# Altium PCB PCB1.PcbDoc (part 1 of 4)
Units mil, origin at the board's own origin, x right, y up, seen from the top; angles counter-clockwise.
Board outline 1968.5 x 2362.2 mil, 4 copper layers (Top Layer, GND, VCC, Bottom Layer), stack 30.634 mil thick; 134 components, 248 nets, 1063 pads, 710 vias.
Unrouted connection lines stored in the file: 163.
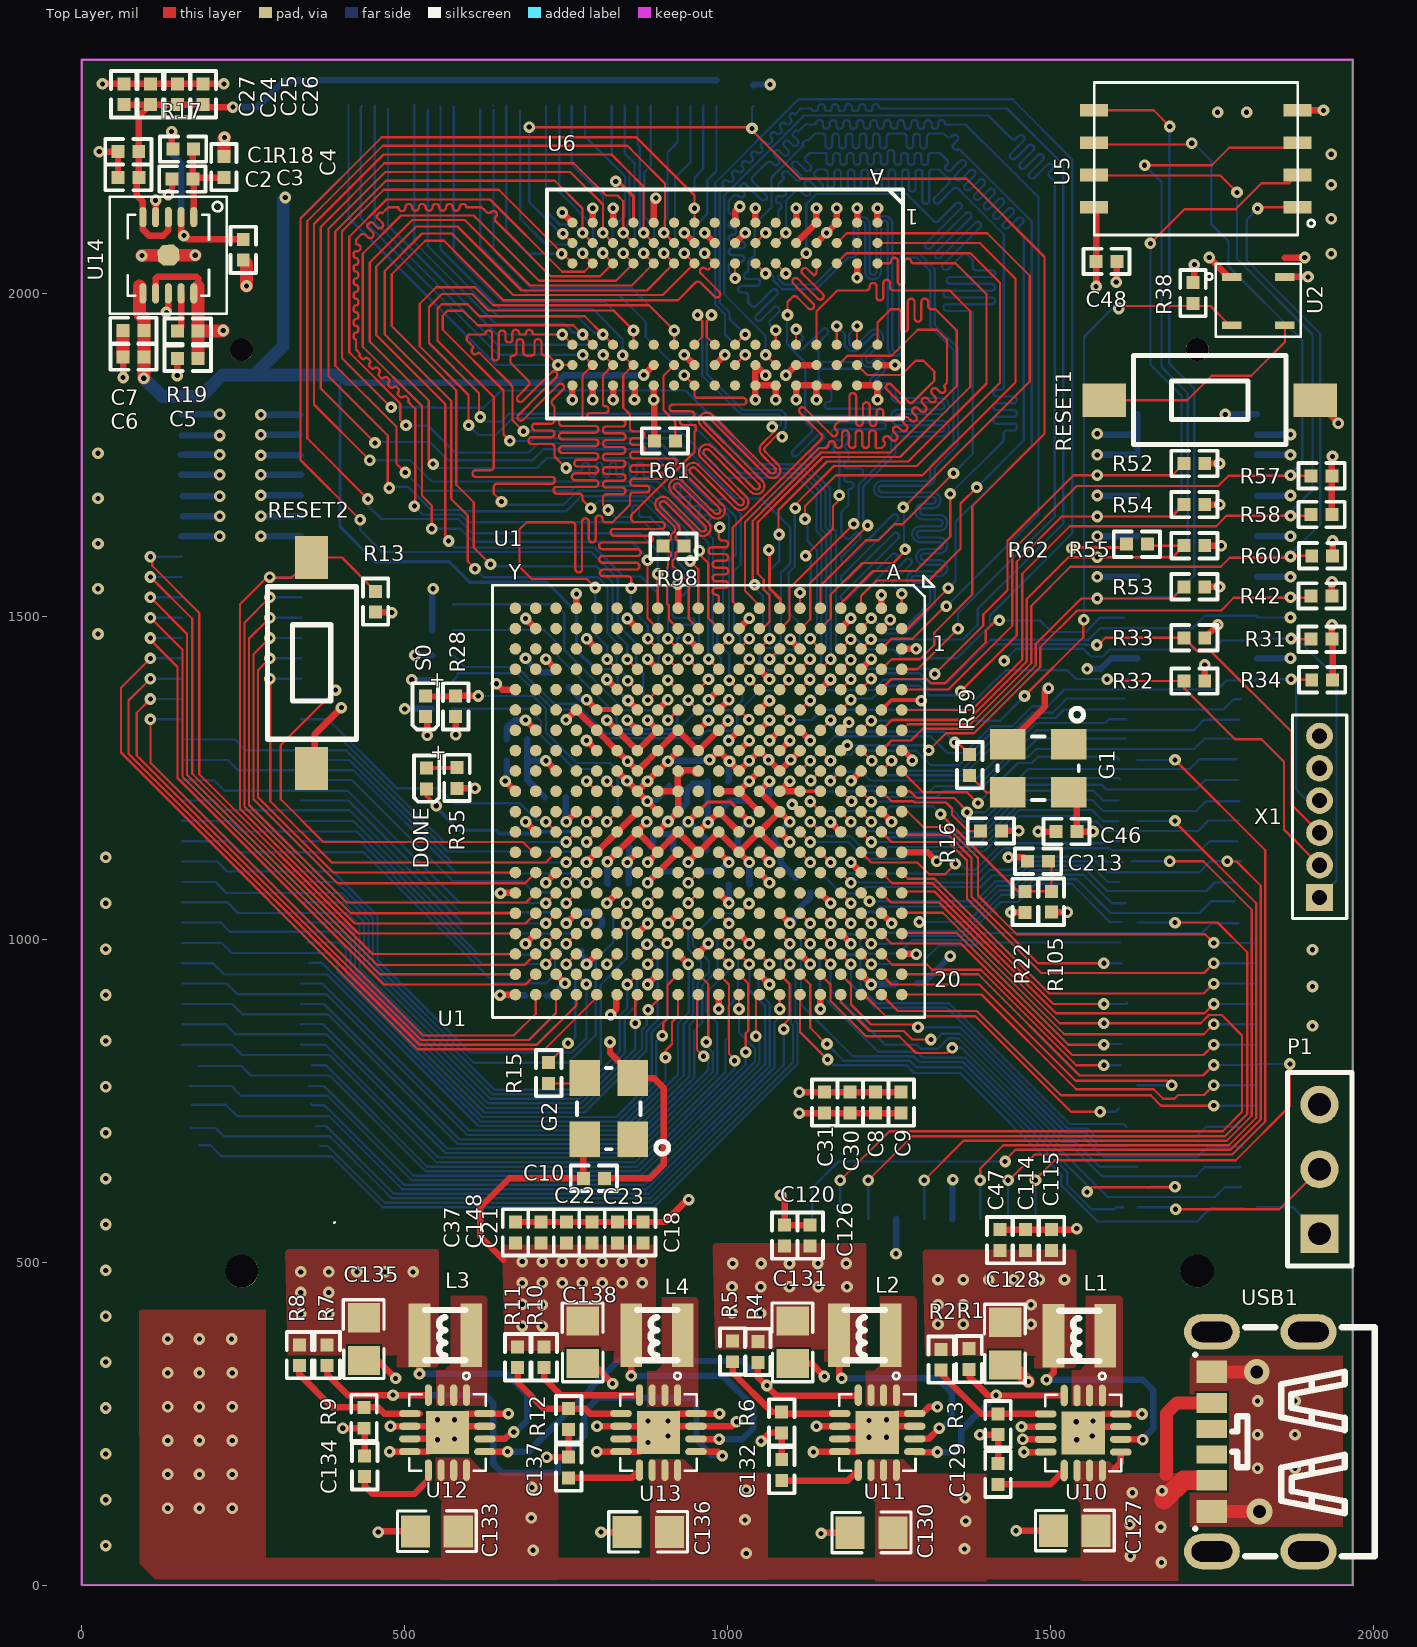
[diagram p0: Top Layer view]
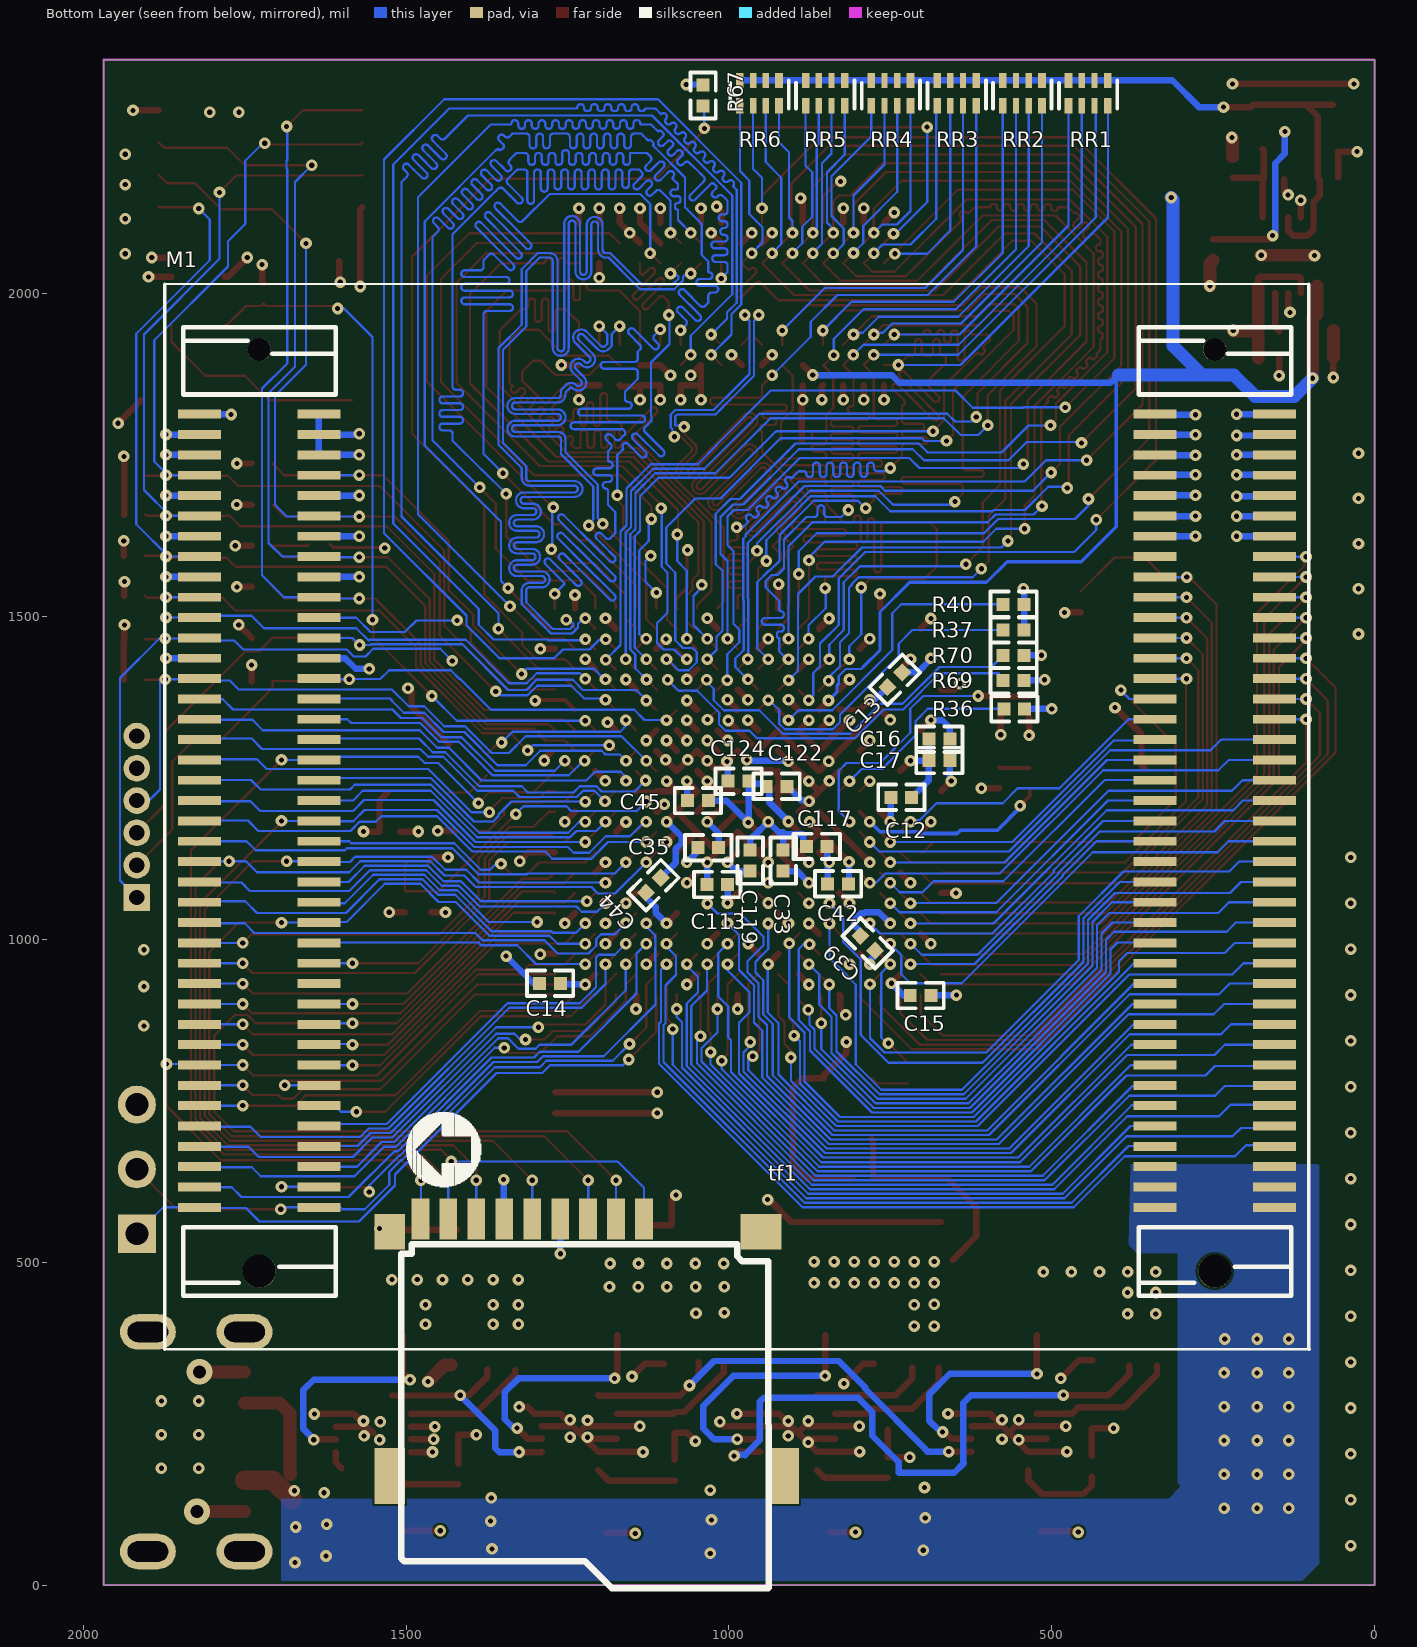
[diagram p1: Bottom Layer view, seen from below]
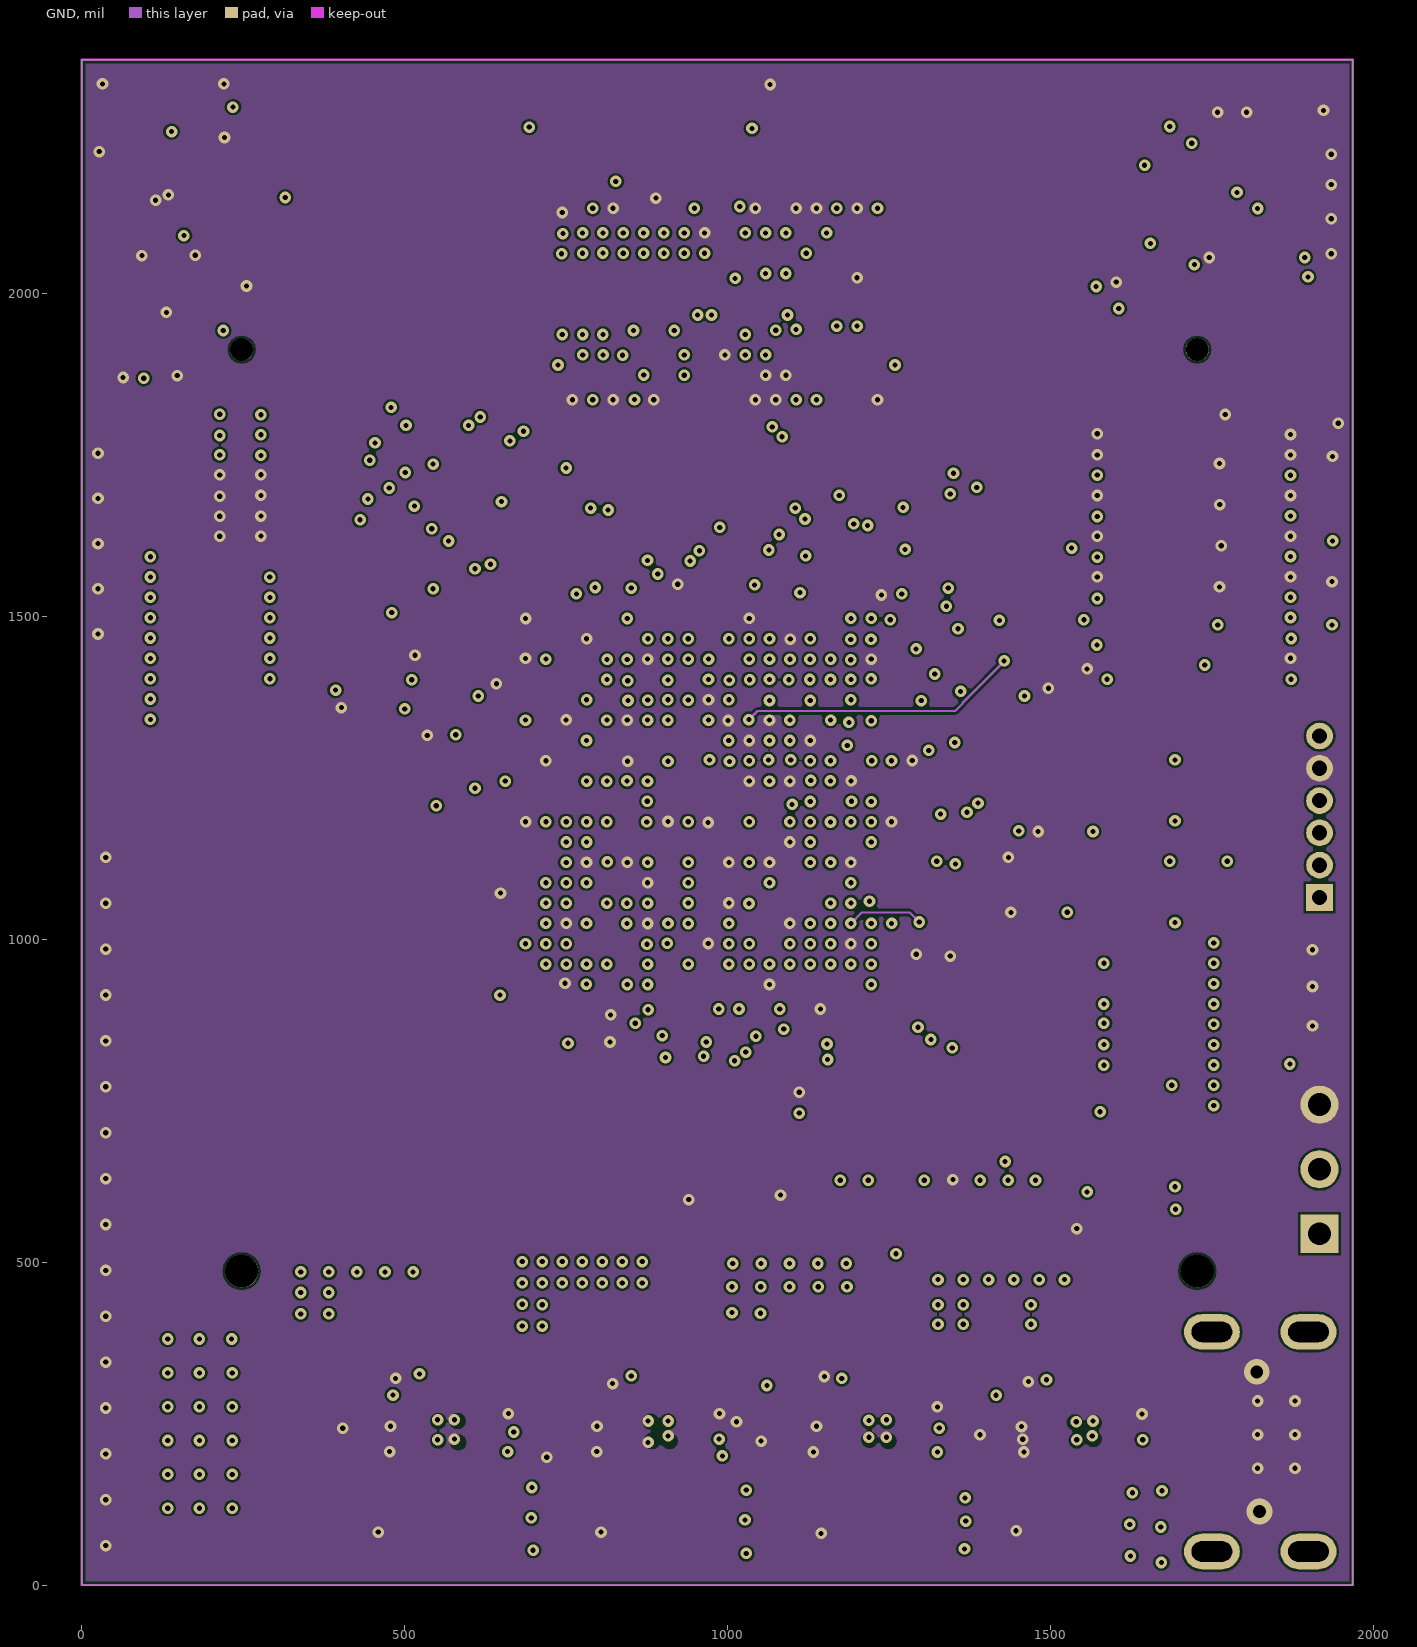
[diagram p2: GND]
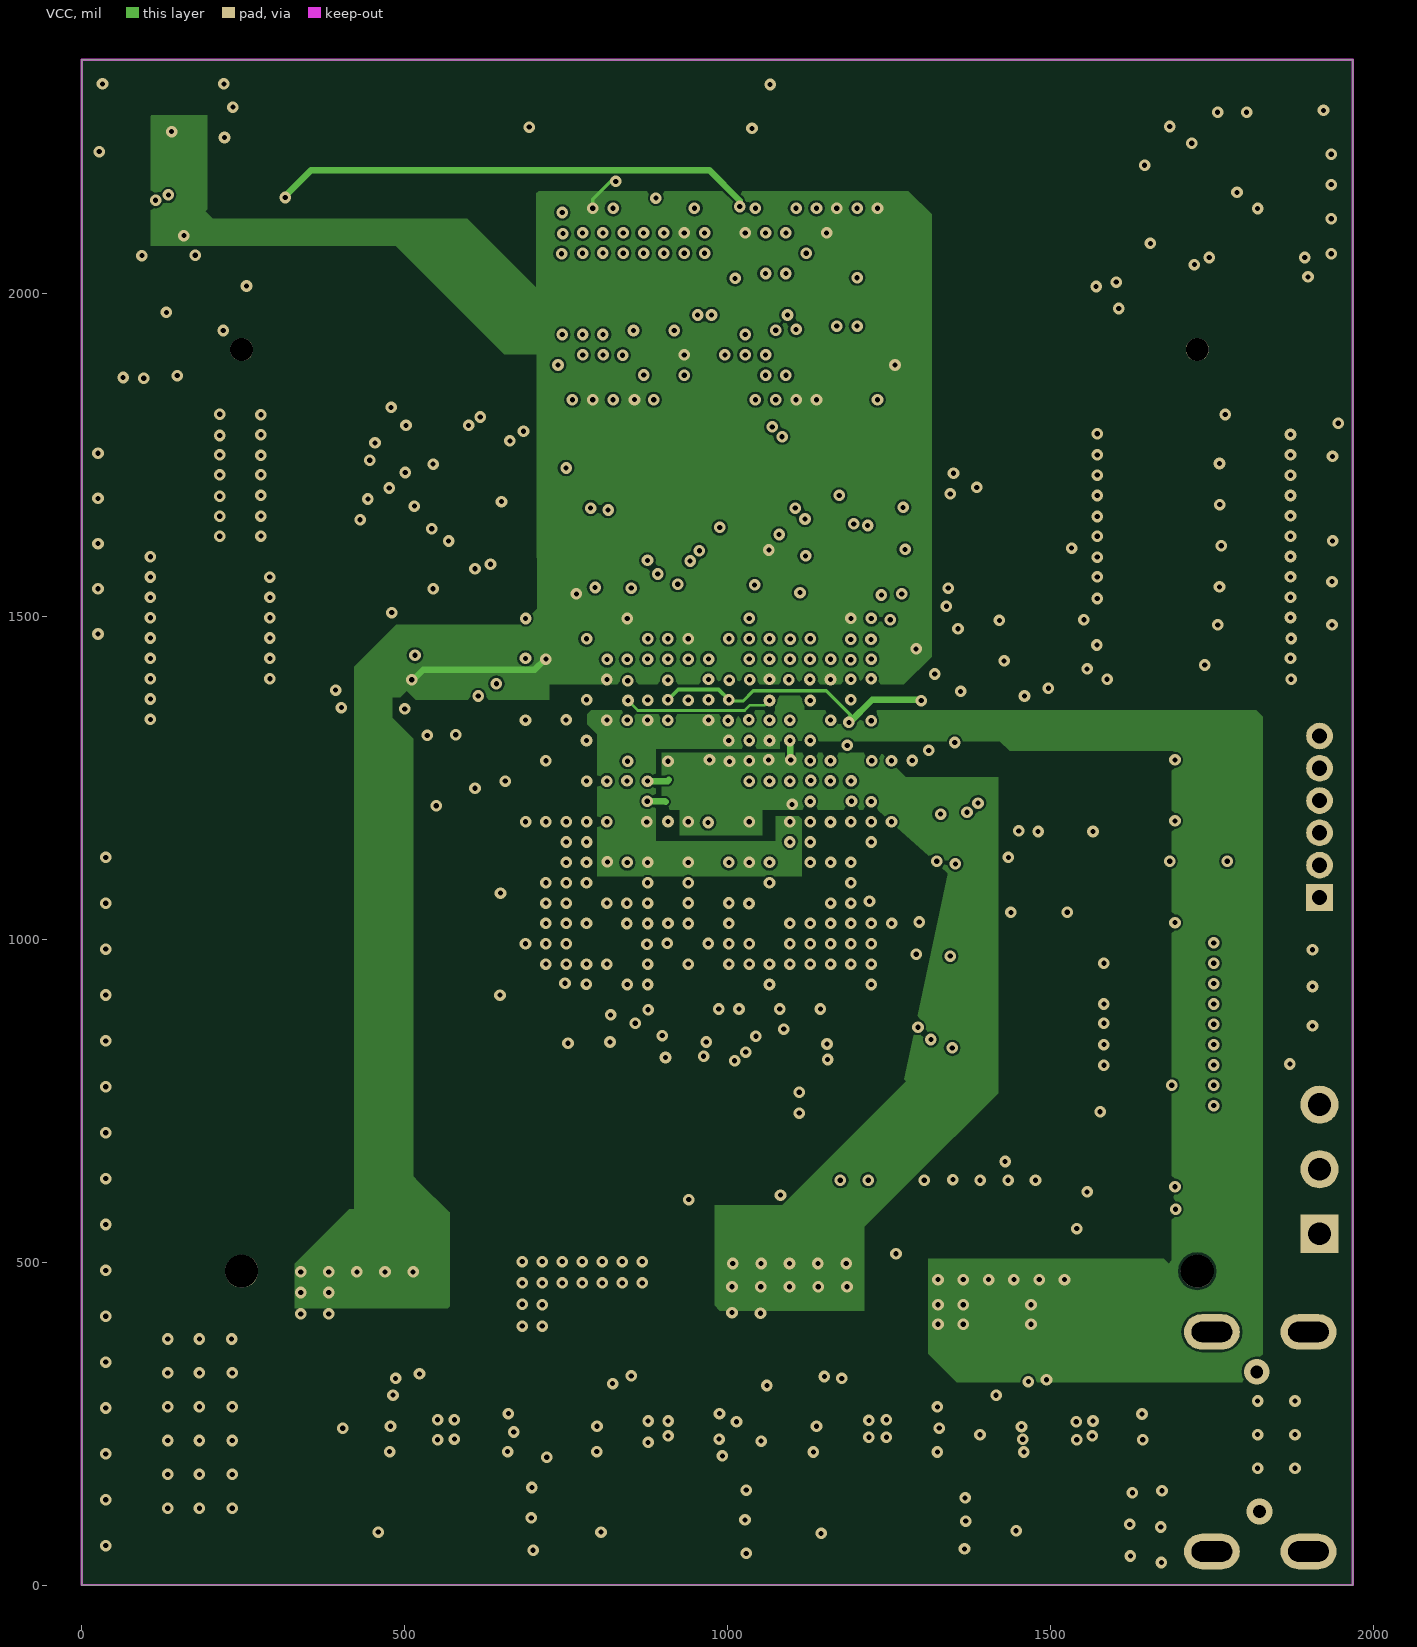
[diagram p3: VCC]

## Layer stack, top to bottom
Top Solder: solder mask 0.4, Solder Resist, Dk 3.5
Top Layer: signal copper 1.4
Dielectric 1: core 10, FR-4, Dk 4.2
GND: signal copper 1.417
Dielectric 3: prepreg 5, Dk 4.2
VCC: signal copper 1.417
Dielectric 2: core 10, Dk 4.2
Bottom Layer: signal copper 1.4
Bottom Solder: solder mask 0.4, Solder Resist, Dk 3.5

## Board outline
0,0 1968.5,0 1968.5,2362.2 0,2362.2

## Design rules (kind name [scope] priority, off if disabled: settings)
Clearance Clearance_2 [InNamedPolygon('POWER3')] p1: gap=10 ignorepadtopadclearanceinfootprint=FALSE
Clearance Clearance_1 [InNamedPolygon('POWER2')] p2: gap=5 ignorepadtopadclearanceinfootprint=FALSE
Clearance [All] p3: gap=3.5 ignorepadtopadclearanceinfootprint=FALSE
DiffPairsRouting DiffPair_DiffPairsRouting [InDifferentialPair ('ADDR3-CLK0')] p1: maxlimit=10 minlimit=3.5 mostfreqgap=3.5 toplayer_minwidth=3.5 toplayer_maxwidth=5 toplayer_prefwidth=3.5 midlayer1_minwidth=3.5 midlayer1_maxwidth=5 midlayer1_prefwidth=3.5 midlayer2_minwidth=3.5 midlayer2_maxwidth=5 midlayer2_prefwidth=3.5 bottomlayer_minwidth=3.5 bottomlayer_maxwidth=5 bottomlayer_prefwidth=3.5 maxuncoupledlength=500
DiffPairsRouting [All] p2: maxlimit=10 minlimit=3.5 mostfreqgap=3.5 toplayer_minwidth=3.5 toplayer_maxwidth=5 toplayer_prefwidth=3.5 midlayer1_minwidth=3.5 midlayer1_maxwidth=5 midlayer1_prefwidth=3.5 midlayer2_minwidth=3.5 midlayer2_maxwidth=5 midlayer2_prefwidth=3.5 bottomlayer_minwidth=3.5 bottomlayer_maxwidth=5 bottomlayer_prefwidth=3.5 maxuncoupledlength=500
MatchedLengths MatchedLengths_1 [All] p1: tolerance=1000 checknetsindiffpair=FALSE checkdiffpairvsdiffpair=TRUE checkxsignals=TRUE checkothers=TRUE
MatchedLengths [InDifferentialPair ('ADDR3-CLK0')] p2: tolerance=1000 checknetsindiffpair=FALSE checkdiffpairvsdiffpair=TRUE checkxsignals=TRUE checkothers=TRUE
MatchedLengths DiffPair_MatchedLengths [InDifferentialPair ('ADDR3-CLK0')] p3: tolerance=1000 checknetsindiffpair=FALSE checkdiffpairvsdiffpair=TRUE checkxsignals=TRUE checkothers=TRUE
PolygonConnect [All] p1: connectstyle=Direct reliefconductorwidth=10 reliefentries=4 polygonreliefangle="90 Angle" airgapwidth=10
RoutingVias [All] p1: holewidth=8 width=18 viastyle="Through Hole" minholewidth=8 minwidth=18 maxholewidth=28 maxwidth=50
SolderMaskExpansion [All] p1: expansion=4
Width power [InNetClass('POWER')] p1: maxlimit=40 minlimit=3.5 preferedwidth=10
Width [All] p2: maxlimit=40 minlimit=3.5 preferedwidth=3.5
29 further rules are at their usual default settings.

## Classes and differential pairs
net class sd: MMC-CMD MMC-D0 MMC-D1 MMC-D2 MMC-D3 MMC-SCLK
net class ddr_dh: ADDR3-D8 ADDR3-D9 ADDR3-D10 ADDR3-D11 ADDR3-D12 ADDR3-D13 ADDR3-D14 ADDR3-D15 ADDR3-DM1 ADDR3-DQS1_N ADDR3-DQS1_P
net class b35_io: B35_0 B35_25 B35_L1_N B35_L1_P B35_L2_N B35_L2_P B35_L3_N B35_L3_P B35_L4_N B35_L4_P B35_L5_N B35_L5_P B35_L6_N B35_L6_P B35_L7_N B35_L7_P B35_L8_N B35_L8_P B35_L9_N B35_L9_P B35_L10_N B35_L10_P B35_L11_N B35_L11_P B35_L12_N B35_L12_P B35_L13_N B35_L13_P B35_L14_N B35_L14_P B35_L15_N B35_L15_P B35_L16_N B35_L16_P B35_L17_N B35_L17_P B35_L18_N B35_L18_P B35_L19_N B35_L19_P B35_L20_N B35_L20_P B35_L21_N B35_L21_P B35_L22_N B35_L22_P B35_L23_N B35_L23_P B35_L24_N B35_L24_P
net class b34_io: B34_0 B34_25 B34_L1_N B34_L1_P B34_L2_N B34_L2_P B34_L3_N B34_L3_P B34_L4_N B34_L4_P B34_L5_N B34_L5_P B34_L6_N B34_L6_P B34_L7_N B34_L7_P B34_L8_N B34_L8_P B34_L9_N B34_L9_P B34_L10_N B34_L10_P B34_L11_N B34_L11_P B34_L12_N B34_L12_P B34_L13_N B34_L13_P B34_L14_N B34_L14_P B34_L15_N B34_L15_P B34_L16_N B34_L16_P B34_L17_N B34_L17_P B34_L18_N B34_L18_P B34_L19_N B34_L19_P B34_L20_N B34_L20_P B34_L21_N B34_L21_P B34_L22_N B34_L22_P B34_L23_N B34_L23_P B34_L24_N B34_L24_P
net class psio: MIO9 MIO10 MIO11 MIO12 MIO13 MIO14 MIO15 MIO16 MIO17 MIO18 MIO19 MIO20 MIO21 MIO22 MIO23 MIO24 MIO25 MIO26 MIO27 MIO28 MIO29 MIO30 MIO31 MIO32 MIO33 MIO34 MIO35 MIO36 MIO37 MIO38 MIO39 MIO46 MIO47 MIO48 MIO49 MIO50 MIO51 MIO52 MIO53 MMC-CMD MMC-D0 MMC-D1 MMC-D2 MMC-D3
net class mode: ASPI-CS ASPI-DQ0/MODE0 ASPI-DQ1/MODE1 ASPI-DQ2/MODE2 ASPI-DQ3/MODE3 ASPI-SCK/MODE4 V500 V501
net class ddr_c: ADDR3-A0 ADDR3-A1 ADDR3-A2 ADDR3-A3 ADDR3-A4 ADDR3-A5 ADDR3-A6 ADDR3-A7 ADDR3-A8 ADDR3-A9 ADDR3-A10 ADDR3-A11 ADDR3-A12 ADDR3-A13 ADDR3-A14 ADDR3-BA0 ADDR3-BA1 ADDR3-BA2 ADDR3-CAS ADDR3-CKE0 ADDR3-ODT0 ADDR3-RAS ADDR3-S0 ADDR3-WE
net class ddr_x: ADDR3-A0 ADDR3-A1 ADDR3-A2 ADDR3-A3 ADDR3-A4 ADDR3-A5 ADDR3-A6 ADDR3-A7 ADDR3-A8 ADDR3-A9 ADDR3-A10 ADDR3-A11 ADDR3-A12 ADDR3-A13 ADDR3-A14 ADDR3-BA0 ADDR3-BA1 ADDR3-BA2 ADDR3-CAS ADDR3-CKE0 ADDR3-ODT0 ADDR3-RAS ADDR3-S0 ADDR3-WE
net class ddr_dl: ADDR3-D0 ADDR3-D1 ADDR3-D2 ADDR3-D3 ADDR3-D4 ADDR3-D5 ADDR3-D6 ADDR3-D7 ADDR3-DM0 ADDR3-DQS0_N ADDR3-DQS0_P
net class ddr_a: ADDR3-A0 ADDR3-A1 ADDR3-A2 ADDR3-A3 ADDR3-A4 ADDR3-A5 ADDR3-A6 ADDR3-A7 ADDR3-A8 ADDR3-A9 ADDR3-A10 ADDR3-A11 ADDR3-A12 ADDR3-A13 ADDR3-A14 ADDR3-CLK0_N ADDR3-CLK0_P
net class POWER: GND VCC-1V0 VCC-1V5 VCC-1V8 VCC-3V3
component class ZYNQ400-POWER: C42 C44 C45 C47 C113 C114 C115 C117 C119 C120 C122 C124 C126
component class ZYNQ400-MIO: C30 C31 C33 C35 C37 C39 C46 C48 C148 C213 DONE G1 R16 R22 R31 R32 R33 R34 R35 R36 R37 R38 R40 R42 R52 R53 R54 R55 R57 R58 R59 R60 R62 R105 RESET1 tf1 U1 U2 U5 X1
component class ZYNQ400-EMIO: C8 C9 C10 C12 C13 C14 C15 C16 C17 C18 C21 C22 C23 G2 R13 R15 R28 RESET2 S0
component class ZYNQ400-DDR: R61 R67 R69 R70 R98 RR1 RR2 RR3 RR4 RR5 RR6 U6
component class ZYNQ400-CONDIP: M1 P1
component class SYS-PS: C1 C2 C3 C4 C5 C6 C7 C24 C25 C26 C27 C127 C128 C129 C130 C131 C132 C133 C134 C135 C136 C137 C138 L1 L2 L3 L4 R1 R2 R3 R4 R5 R6 R7 R8 R9 R10 R11 R12 R17 R18 R19 U10 U11 U12 U13 U14 USB1
differential pair ADDR3-DQS1: +ADDR3-DQS1_P -ADDR3-DQS1_N
differential pair ADDR3-DQS0: +ADDR3-DQS0_P -ADDR3-DQS0_N
differential pair ADDR3-CLK0: +ADDR3-CLK0_P -ADDR3-CLK0_N

## Components (designator, comment, footprint, x,y, rotation, side; value= is the part's Value field where it differs from the comment)
C1 "10UF" 0402 72,2220 r0 top
C2 "10UF" 0402 72.14,2180 r0 top
C3 "10UF" 0402 250,2068 r90 top
C4 "10UF" 0402 220,2196 r90 top
C5 "10UF" 0402 164,1900 r180 top
C6 "10UF" 0402 80,1902 r0 top
C7 "10UF" 0402 79.86,1943 r0 top
C8 "470nf/6.3V" 0402 1229.52,747.14 r90 top
C9 "470nf/6.3V" 0402 1269,747.14 r90 top
C10 "0.1UF" 0402 793,630 r0 top value=0.1uF
C12 "470nf/6.3V" 0402 733,1220 r180 bottom
C13 "470nf/6.3V" 0402 743,1402 r135 bottom
C14 "4.7uf/6.3V" 0402 1277,932 r0 bottom
C15 "47uf/6.3V" 0402 703,913 r0 bottom
C16 "470nf/6.3V" 0402 674,1310 r0 bottom
C17 "470nf/6.3V" 0402 674,1277 r0 bottom
C18 "470nf/6.3V" 0402 869,546.14 r90 top
C21 "47uf/6.3V" 0402 750.57,546.14 r90 top
C22 "470nf/6.3V" 0402 790.05,546.14 r90 top
C23 "470nf/6.3V" 0402 829.52,546.14 r90 top
C24 "0.1UF" 0402 106.09,2308.86 r270 top
C25 "0.1UF" 0402 148,2308.86 r270 top
C26 "0.1UF" 0402 188,2308.86 r270 top
C27 "0.1UF" 0402 65,2308.86 r270 top
C30 "10UF/6.3V" 0402 1190.05,747.14 r90 top
C31 "4.7uf/6.3V" 0402 1150.57,747.14 r90 top
C33 "47uf/6.3V" 0402 916,1122 r270 bottom
C35 "470nf/6.3V" 0402 1032,1142 r0 bottom
C37 "0.1UF" 0402 671.62,546.14 r90 top value=0.1uF
C39 "10UF/6.3V" 0402 785,994 r45 bottom
C42 "470nf/6.3V" 0402 831,1086 r0 bottom
C44 "470nf/6.3V" 0402 1117,1084 r315 bottom
C45 "470nf/6.3V" 0402 1048,1215 r180 bottom
C46 "0.1UF" 0402 1525,1167 r180 top value=0.1uF
C47 "470nf/6.3V" 0402 1421.81,534.22 r90 top
C48 "0.1UF" 0402 1587,2050 r0 top value=0.1uF
C113 "470nf/6.3V" 0402 1018,1085 r180 bottom
C114 "470nf/6.3V" 0402 1461.85,534.22 r90 top
C115 "4.7uf/6.3V" 0402 1501.89,534.22 r90 top
C117 "4.7uf/6.3V" 0402 864,1144 r180 bottom
C119 "470nf/6.3V" 0402 967,1122 r270 bottom
C120 "470nf/6.3V" 0402 1088.37,541.14 r90 top
C122 "470nf/6.3V" 0402 926,1237 r0 bottom
C124 "4.7uf/6.3V" 0402 985,1245 r180 bottom
C126 "470nf/6.3V" 0402 1128,541.14 r90 top
C127 "10uF" C0805 1538,82 r0 top
C128 "10uF" C0805 1432,374 r90 top
C129 "0.1UF" 0402 1419,172 r270 top value=3.3nF
C130 "10uF" C0805 1223,79 r0 top
C131 "10uF" C0805 1103,376 r90 top
C132 "0.1UF" 0402 1084,178 r270 top value=3.3nF
C133 "10uF" C0805 550,81 r0 top
C134 "3.3F" 0402 438,184 r270 top value=3.3nF
C135 "10uF" C0805 439,381 r90 top
C136 "10uF" C0805 877,80 r0 top
C137 "0.1UF" 0402 754,182 r270 top value=3.3nF
C138 "10uF" C0805 778,376 r90 top
C148 "47uf/6.3V" 0402 711.1,546.14 r90 top
C213 "0.1uF" 0402 1481,1121 r180 top
DONE "LED" D0402 532,1361 r270 top
G1 "33.333M/3.3V" 3.2*2.5 1481,1265 r180 top value=33.33MHz
G2 "50M/3.3V" 3.2*2.5 816,738 r90 top value=33.33MHz
L1 "10uH" L1008 1545,386 r180 top
L2 "10uH" L1008 1212.85,387 r180 top
L3 "10uH" L1008 563,387 r180 top
L4 "10uH" L1008 891,387 r180 top
M1 "ZYNQ_CORE" ZYNQ7010&7020 340,585 r90 bottom locked
P1 "Header 3" HDR1X3 1917,544 r90 top
R1 "10K" 0402 1374,350 r90 top
R2 "4.99K" 0402 1331,349 r90 top
R3 "20K" 0402 1419,249 r90 top
R4 "10K" 0402 1047,361 r90 top
R5 "4.99K" 0402 1008,362 r90 top value=18.7K
R6 "15K" 0402 1083.85,251.91 r90 top
R7 "10K" 0402 380,356 r90 top
R8 "4.99K" 0402 337,356 r90 top value=13K
R9 "15K" 0402 437,259 r90 top
R10 "10K" 0402 716,352.86 r90 top
R11 "4.99K" 0402 675,352.86 r90 top value=56.2K
R12 "15K" 0402 754,257 r90 top value=18K
R13 "10K" 0402 455,1523 r270 top
R15 "33R" 0402 723,793 r90 top
R16 "10K" 0402 1408,1168 r0 top
R17 "1K" 0402 157,2224 r0 top value=4.7K
R18 "1K" 0402 155.78,2177.59 r180 top value=4.7K
R19 "1K" 0402 164,1942 r0 top value=100K
R22 "1K@0.1%" 0402 1461,1058 r270 top value=1K
R28 "1K" 0402 581,1250 r270 top
R31 "10K" 0402 1920,1465 r180 top
R32 "10K" 0402 1723,1400 r180 top
R33 "10K" 0402 1723,1467 r180 top
R34 "10K" 0402 1921,1402 r180 top
R35 "1K" 0402 579,1361 r270 top value=2K
R36 "10K" 0402 558,1357 r0 bottom
R37 "10K" 0402 559,1479 r180 bottom
R38 "10K" 0402 1721,2001 r90 top
R40 "10K" 0402 559,1519 r180 bottom
R42 "10K" 0402 1920,1532 r180 top
R52 "10K" 0402 1723,1737 r180 top
R53 "10K" 0402 1723,1546 r180 top
R54 "10K" 0402 1723,1673.33 r180 top
R55 "10K" 0402 1723,1609.67 r180 top
R57 "10K" 0402 1920,1718 r180 top
R58 "10K" 0402 1920,1658 r180 top
R59 "33R" 0402 1375,1270 r90 top
R60 "10K" 0402 1921,1594 r180 top
R61 "240R@1%" 0402 903,1772 r180 top value=240R
R62 "10K" 0402 1634,1612 r180 top
R67 "10K" 0402 1040,2307 r90 bottom
R69 "80.6R@1%" 0402 559,1401 r0 bottom value=80.6R
R70 "80.6R@1%" 0402 559,1440 r0 bottom value=80.6R
R98 "DNI/80.6R@1%" 0402 916.12,1609 r180 top value=80.6R
R105 "1K@0.1%" 0402 1501.64,1058.22 r90 top value=1K
RESET1 "SW-PB" "micro button_2_SMD" 1747,1835 r180 top
RESET2 "SW-PB" "micro button_2_SMD" 356,1428 r90 top
RR1 "40.2R@1%" R0402*4 443.68,2310.69 r0 bottom
RR2 "40.2R@1%" R0402*4 545.48,2310.69 r0 bottom
RR3 "40.2R@1%" R0402*4 647.28,2310.69 r0 bottom
RR4 "40.2R@1%" R0402*4 749.09,2310.69 r0 bottom
RR5 "40.2R@1%" R0402*4 850.89,2310.69 r0 bottom
RR6 "40.2R@1%" R0402*4 952.69,2310.69 r0 bottom
S0 "LED" D0402 534,1249 r270 top
tf1 "TF-SD" TF 1220,368 r270 bottom
U1 "XC7Z020CLG400" CLG400 971,1214 r270 top locked
U2 "TCM811TE" TCM811TERCTR 1822,1990 r270 top
U5 "S25FL256SAGNFI00" MLP8 1744,2209 r180 top locked
U6 "MT41J128M16HA-187E:D" FBGA96 996,1984 r270 top locked
U10 "TLV62130" TLV62130RGT 1551,235 r180 top
U11 "TLV62130" TLV62130RGT 1232,235.59 r180 top
U12 "TLV62130" TLV62130RGT 566.15,235.59 r180 top
U13 "TLV62130" TLV62130RGT 893.15,235.59 r180 top
U14 "TPS51200DRCR" TPS_QFN10 134,2060 r270 top
USB1 "TYPE-C 6P" TYPE-C-SMD_TYPE-C-6P 1825,222 r90 top locked
X1 "JTAG" 1.27*6 1917,1065 r90 top

## Footprints (in the part's own frame and the unit in brackets; to place one, negate y for a bottom-side part, rotate by r counter-clockwise, add the part's x,y. Pads: shape width x height; smd on the part's side, far side on the other; paste and mask are expansions set on the pad)
1.27*6 [mm]
  rect 1.05x1.05 hole 0.6: 1(0,0)
  round 1.05 hole 0.6: 2(1.27,0) 3(2.54,0) 4(3.81,0) 5(5.08,0) 6(6.35,0)
  silkscreen extent -0.82,-1.07 7.17,1.07
3.2*2.5 [mm]
  rect 1.4x1.2 smd: 1(-1.2,-0.95) 2(1.2,-0.95) 3(1.2,0.95) 4(-1.2,0.95)
  silkscreen extent -1.79,-2.36 1.6,1.25
0402 [mm]
  rect 0.51x0.51 smd: 1(-0.41,0) 2(0.41,0)
  silkscreen extent -0.91,-0.5 0.91,0.5
C0805 [mil]
  rect 45x50 smd: 1(-33,2) 2(33,2)
  silkscreen extent -61,-29 61,34
CLG400 [mil] "CLG400"
  round 18 smd: A1(-298.85,298.85) A2(-267.35,298.85) A3(-235.85,298.85) A4(-204.35,298.85) A5(-172.85,298.85) A6(-141.35,298.85) A7(-109.85,298.85) A8(-78.35,298.85) A9(-46.85,298.85) A10(-15.45,298.85) A11(16.15,298.85) A12(47.55,298.85) A13(79.05,298.85) A14(110.55,298.85) A15(142.05,298.85) A16(173.55,298.85) A17(205.05,298.85) A18(236.55,298.85) A19(268.05,298.85) A20(299.55,298.85) B1(-298.85,267.35) B2(-267.35,267.35) B3(-235.85,267.35) B4(-204.35,267.35) B5(-172.85,267.35) B6(-141.35,267.35) B7(-109.85,267.35) B8(-78.35,267.35) B9(-46.85,267.35) B10(-15.45,267.35) B11(16.15,267.35) B12(47.55,267.35) B13(79.05,267.35) B14(110.55,267.35) B15(142.05,267.35) B16(173.55,267.35) B17(205.05,267.35) B18(236.55,267.35) B19(268.05,267.35) B20(299.55,267.35) C1(-298.85,235.85) C2(-267.35,235.85) C3(-235.85,235.85) C4(-204.35,235.85) C5(-172.85,235.85) C6(-141.35,235.85) C7(-109.85,235.85) C8(-78.35,235.85) C9(-46.85,235.85) C10(-15.45,235.85) C11(16.15,235.85) C12(47.55,235.85) C13(79.05,235.85) C14(110.55,235.85) C15(142.05,235.85) C16(173.55,235.85) C17(205.05,235.85) C18(236.55,235.85) C19(268.05,235.85) C20(299.55,235.85) D1(-298.85,204.35) D2(-267.35,204.35) D3(-235.85,204.35) D4(-204.35,204.35) D5(-172.85,204.35) D6(-141.35,204.35) D7(-109.85,204.35) D8(-78.35,204.35) D9(-46.85,204.35) D10(-15.45,204.35) D11(16.15,204.35) D12(47.55,204.35) D13(79.05,204.35) D14(110.55,204.35) D15(142.05,204.35) D16(173.55,204.35) D17(205.05,204.35) D18(236.55,204.35) D19(268.05,204.35) D20(299.55,204.35) E1(-298.85,172.85) E2(-267.35,172.85) E3(-235.85,172.85) E4(-204.35,172.85) E5(-172.85,172.85) E6(-141.35,172.85) E7(-109.85,172.85) E8(-78.35,172.85) E9(-46.85,172.85) E10(-15.45,172.85) E11(16.15,172.85) E12(47.55,172.85) E13(79.05,172.85) E14(110.55,172.85) E15(142.05,172.85) E16(173.55,172.85) E17(205.05,172.85) E18(236.55,172.85) E19(268.05,172.85) E20(299.55,172.85) F1(-298.85,141.35) F2(-267.35,141.35) F3(-235.85,141.35) F4(-204.35,141.35) F5(-172.85,141.35) F6(-141.35,141.35) F7(-109.85,141.35) F8(-78.35,141.35) F9(-46.85,141.35) F10(-15.45,141.35) F11(16.15,141.35) F12(47.55,141.35) F13(79.05,141.35) F14(110.55,141.35) F15(142.05,141.35) F16(173.55,141.35) F17(205.05,141.35) F18(236.55,141.35) F19(268.05,141.35) F20(299.55,141.35) G1(-298.85,109.85) G2(-267.35,109.85) G3(-235.85,109.85) G4(-204.35,109.85) G5(-172.85,109.85) G6(-141.35,109.85) G7(-109.85,109.85) G8(-78.35,109.85) G9(-46.85,109.85) G10(-15.45,109.85) G11(16.15,109.85) G12(47.55,109.85) G13(79.05,109.85) G14(110.55,109.85) G15(142.05,109.85) G16(173.55,109.85) G17(205.05,109.85) G18(236.55,109.85) G19(268.05,109.85) G20(299.55,109.85) H1(-298.85,78.35) H2(-267.35,78.35) H3(-235.85,78.35) H4(-204.35,78.35) H5(-172.85,78.35) H6(-141.35,78.35) H7(-109.85,78.35) H8(-78.35,78.35) H9(-46.85,78.35) H10(-15.45,78.35) H11(16.15,78.35) H12(47.55,78.35) H13(79.05,78.35) H14(110.55,78.35) H15(142.05,78.35) H16(173.55,78.35) H17(205.05,78.35) H18(236.55,78.35) H19(268.05,78.35) H20(299.55,78.35) J1(-298.85,46.85) J2(-267.35,46.85) J3(-235.85,46.85) J4(-204.35,46.85) J5(-172.85,46.85) J6(-141.35,46.85) J7(-109.85,46.85) J8(-78.35,46.85) J9(-46.85,46.85) J10(-15.45,46.85) J11(16.15,46.85) J12(47.55,46.85) J13(79.05,46.85) J14(110.55,46.85) J15(142.05,46.85) J16(173.55,46.85) J17(205.05,46.85) J18(236.55,46.85) J19(268.05,46.85) J20(299.55,46.85) K1(-298.85,15.45) K2(-267.35,15.45) K3(-235.85,15.45) K4(-204.35,15.45) K5(-172.85,15.45) K6(-141.35,15.45) K7(-109.85,15.45) K8(-78.35,15.45) K9(-46.85,15.45) K10(-15.45,15.45) K11(16.15,15.45) K12(47.55,15.45) K13(79.05,15.45) K14(110.55,15.45) K15(142.05,15.45) K16(173.55,15.45) K17(205.05,15.45) K18(236.55,15.45) K19(268.05,15.45) K20(299.55,15.45) L1(-298.85,-16.15) L2(-267.35,-16.15) L3(-235.85,-16.15) L4(-204.35,-16.15) L5(-172.85,-16.15) L6(-141.35,-16.15) L7(-109.85,-16.15) L8(-78.35,-16.15) L9(-46.85,-16.15) L10(-15.45,-16.15) L11(16.15,-16.15) L12(47.55,-16.15) L13(79.05,-16.15) L14(110.55,-16.15) L15(142.05,-16.15) L16(173.55,-16.15) L17(205.05,-16.15) L18(236.55,-16.15) L19(268.05,-16.15) L20(299.55,-16.15) M1(-298.85,-47.55) M2(-267.35,-47.55) M3(-235.85,-47.55) M4(-204.35,-47.55) M5(-172.85,-47.55) M6(-141.35,-47.55) M7(-109.85,-47.55) M8(-78.35,-47.55) M9(-46.85,-47.55) M10(-15.45,-47.55) M11(16.15,-47.55) M12(47.55,-47.55) M13(79.05,-47.55) M14(110.55,-47.55) M15(142.05,-47.55) M16(173.55,-47.55) M17(205.05,-47.55) M18(236.55,-47.55) M19(268.05,-47.55) M20(299.55,-47.55) N1(-298.85,-79.05) N2(-267.35,-79.05) N3(-235.85,-79.05) N4(-204.35,-79.05) N5(-172.85,-79.05) N6(-141.35,-79.05) N7(-109.85,-79.05) N8(-78.35,-79.05) N9(-46.85,-79.05) N10(-15.45,-79.05) N11(16.15,-79.05) N12(47.55,-79.05) N13(79.05,-79.05) N14(110.55,-79.05) N15(142.05,-79.05) N16(173.55,-79.05) N17(205.05,-79.05) N18(236.55,-79.05) N19(268.05,-79.05) N20(299.55,-79.05) P1(-298.85,-110.55) P2(-267.35,-110.55) P3(-235.85,-110.55) P4(-204.35,-110.55) P5(-172.85,-110.55) P6(-141.35,-110.55) P7(-109.85,-110.55) P8(-78.35,-110.55) P9(-46.85,-110.55) P10(-15.45,-110.55) P11(16.15,-110.55) P12(47.55,-110.55) P13(79.05,-110.55) P14(110.55,-110.55) P15(142.05,-110.55) P16(173.55,-110.55) P17(205.05,-110.55) P18(236.55,-110.55) P19(268.05,-110.55) P20(299.55,-110.55) R1(-298.85,-142.05) R2(-267.35,-142.05) R3(-235.85,-142.05) R4(-204.35,-142.05) R5(-172.85,-142.05) R6(-141.35,-142.05) R7(-109.85,-142.05) R8(-78.35,-142.05) R9(-46.85,-142.05) R10(-15.45,-142.05) R11(16.15,-142.05) R12(47.55,-142.05) R13(79.05,-142.05) R14(110.55,-142.05) R15(142.05,-142.05) R16(173.55,-142.05) R17(205.05,-142.05) R18(236.55,-142.05) R19(268.05,-142.05) R20(299.55,-142.05) T1(-298.85,-173.55) T2(-267.35,-173.55) T3(-235.85,-173.55) T4(-204.35,-173.55) T5(-172.85,-173.55) T6(-141.35,-173.55) T7(-109.85,-173.55) T8(-78.35,-173.55) T9(-46.85,-173.55) T10(-15.45,-173.55) T11(16.15,-173.55) T12(47.55,-173.55) T13(79.05,-173.55) T14(110.55,-173.55) T15(142.05,-173.55) T16(173.55,-173.55) T17(205.05,-173.55) T18(236.55,-173.55) T19(268.05,-173.55) T20(299.55,-173.55) U1(-298.85,-205.05) U2(-267.35,-205.05) U3(-235.85,-205.05) U4(-204.35,-205.05) U5(-172.85,-205.05) U6(-141.35,-205.05) U7(-109.85,-205.05) U8(-78.35,-205.05) U9(-46.85,-205.05) U10(-15.45,-205.05) U11(16.15,-205.05) U12(47.55,-205.05) U13(79.05,-205.05) U14(110.55,-205.05) U15(142.05,-205.05) U16(173.55,-205.05) U17(205.05,-205.05) U18(236.55,-205.05) U19(268.05,-205.05) U20(299.55,-205.05) V1(-298.85,-236.55) V2(-267.35,-236.55) V3(-235.85,-236.55) V4(-204.35,-236.55) V5(-172.85,-236.55) V6(-141.35,-236.55) V7(-109.85,-236.55) V8(-78.35,-236.55) V9(-46.85,-236.55) V10(-15.45,-236.55) V11(16.15,-236.55) V12(47.55,-236.55) V13(79.05,-236.55) V14(110.55,-236.55) V15(142.05,-236.55) V16(173.55,-236.55) V17(205.05,-236.55) V18(236.55,-236.55) V19(268.05,-236.55) V20(299.55,-236.55) W1(-298.85,-268.05) W2(-267.35,-268.05) W3(-235.85,-268.05) W4(-204.35,-268.05) W5(-172.85,-268.05) W6(-141.35,-268.05) W7(-109.85,-268.05) W8(-78.35,-268.05) W9(-46.85,-268.05) W10(-15.45,-268.05) W11(16.15,-268.05) W12(47.55,-268.05) W13(79.05,-268.05) W14(110.55,-268.05) W15(142.05,-268.05) W16(173.55,-268.05) W17(205.05,-268.05) W18(236.55,-268.05) W19(268.05,-268.05) W20(299.55,-268.05) Y1(-298.85,-299.55) Y2(-267.35,-299.55) Y3(-235.85,-299.55) Y4(-204.35,-299.55) Y5(-172.85,-299.55) Y6(-141.35,-299.55) Y7(-109.85,-299.55) Y8(-78.35,-299.55) Y9(-46.85,-299.55) Y10(-15.45,-299.55) Y11(16.15,-299.55) Y12(47.55,-299.55) Y13(79.05,-299.55) Y14(110.55,-299.55) Y15(142.05,-299.55) Y16(173.55,-299.55) Y17(205.05,-299.55) Y18(236.55,-299.55) Y19(268.05,-299.55) Y20(299.55,-299.55)
  silkscreen extent -349,-335 335,349
D0402 [mm]
  rect 0.51x0.51 smd: 1(-0.41,0) 2(0.41,0)
  silkscreen extent -0.91,-0.5 0.91,0.5
FBGA96 [mm]
  round 0.4 smd: A1(-3.2,6) A2(-2.4,6) A3(-1.6,6) A7(1.6,6) A8(2.4,6) A9(3.2,6) B1(-3.2,5.2) B2(-2.4,5.2) B3(-1.6,5.2) B7(1.6,5.2) B8(2.4,5.2) B9(3.2,5.2) C1(-3.2,4.4) C2(-2.4,4.4) C3(-1.6,4.4) C7(1.6,4.4) C8(2.4,4.4) C9(3.2,4.4) D1(-3.2,3.6) D2(-2.4,3.6) D3(-1.6,3.6) D7(1.6,3.6) D8(2.4,3.6) D9(3.2,3.6) E1(-3.2,2.8) E2(-2.4,2.8) E3(-1.6,2.8) E7(1.6,2.8) E8(2.4,2.8) E9(3.2,2.8) F1(-3.2,2) F2(-2.4,2) F3(-1.6,2) F7(1.6,2) F8(2.4,2) F9(3.2,2) G1(-3.2,1.2) G2(-2.4,1.2) G3(-1.6,1.2) G7(1.6,1.2) G8(2.4,1.2) G9(3.2,1.2) H1(-3.2,0.4) H2(-2.4,0.4) H3(-1.6,0.4) H7(1.6,0.4) H8(2.4,0.4) H9(3.2,0.4) J1(-3.2,-0.4) J2(-2.4,-0.4) J3(-1.6,-0.4) J7(1.6,-0.4) J8(2.4,-0.4) J9(3.2,-0.4) K1(-3.2,-1.2) K2(-2.4,-1.2) K3(-1.6,-1.2) K7(1.6,-1.2) K8(2.4,-1.2) K9(3.2,-1.2) L1(-3.2,-2) L2(-2.4,-2) L3(-1.6,-2) L7(1.6,-2) L8(2.4,-2) L9(3.2,-2) M1(-3.2,-2.8) M2(-2.4,-2.8) M3(-1.6,-2.8) M7(1.6,-2.8) M8(2.4,-2.8) M9(3.2,-2.8) N1(-3.2,-3.6) N2(-2.4,-3.6) N3(-1.6,-3.6) N7(1.6,-3.6) N8(2.4,-3.6) N9(3.2,-3.6) P1(-3.2,-4.4) P2(-2.4,-4.4) P3(-1.6,-4.4) P7(1.6,-4.4) P8(2.4,-4.4) P9(3.2,-4.4) R1(-3.2,-5.2) R2(-2.4,-5.2) R3(-1.6,-5.2) R7(1.6,-5.2) R8(2.4,-5.2) R9(3.2,-5.2) T1(-3.2,-6) T2(-2.4,-6) T3(-1.6,-6) T7(1.6,-6) T8(2.4,-6) T9(3.2,-6)
  silkscreen extent -4.5,-7 4.5,7
HDR1X3 [mm] "Connector; Header; 3 Position"
  rect 1.5x1.5 hole 0.9: 1(0,0)
  round 1.5 hole 0.9: 2(2.54,0) 3(5.08,0)
  silkscreen extent -1.27,-1.27 6.35,1.27
L1008 [mil]
  rect 33.5x98.4 smd: 1(-39.92,0) 2(40.08,0)
  silkscreen extent -31,-39 31,39
"micro button_2_SMD" [mm]
  rect 1.7x1.3 smd: 1(-4.15,0) 2(4.15,0)
  silkscreen extent -3,-1.76 3,1.74, body extent -4.5,-1.75 4.5,1.75, height 4.51
MLP8 [mil] "MLP8"
  rect 43.3x19.7 smd: 1(-138.85,75) 2(-138.85,25) 3(-138.85,-25) 4(-138.85,-75) 5(176.15,-75) 6(176.15,-25) 7(176.15,25) 8(176.15,75)
  silkscreen extent -165,-118 176,118
R0402*4 [mm]
  rect 0.3x0.6 smd: 1(-0.77,-0.5) 4(0.77,-0.5) 5(0.77,0.5) 8(-0.77,0.5)
  rect 0.25x0.6 smd: 2(-0.25,-0.5) 3(0.25,-0.5) 6(0.25,0.5) 7(-0.25,0.5)
  silkscreen extent -1.15,-0.5 1.15,0.6
TCM811TERCTR [mil] "TCM811TERCTR"
  rect 12x30 smd: 1(-36,-41.3) 2(39,-41.3) 3(39,41.3) 4(-36,41.3)
  silkscreen extent -57,-81 57,66
TF [mm]
  rect 1.4x1.6 smd: 0(-4.55,6.85)
  rect 1.6x0.7 smd: 1(-5.05,2.25) 2(-5.05,1.15) 3(-5.05,0.05) 4(-5.05,-1.05) 5(-5.05,-2.15) 6(-5.05,-3.25) 7(-5.05,-4.35) 8(-5.05,-5.45) 9(-5.05,-6.55)
  rect 1.4x1.2 smd: 10(-4.55,-7.75)
  rect 2.2x1.2 smd: 11(5.05,-7.75) 12(5.05,7.75)
  silkscreen extent -4.06,-7.29 9.47,7.15
TLV62130RGT [mil] "TLV62130RGT"
  oval 11x33.5 smd: 1(-29.5,-58.6) 2(-9.8,-58.6) 3(9.8,-58.6) 4(29.5,-58.6) 9(29.5,57.6) 10(9.8,57.6) 11(-9.8,57.6) 12(-29.5,57.6)
  oval 33.5x11 smd: 5(58.1,-30) 6(58.1,-10.3) 7(58.1,9.3) 8(58.1,29) 13(-58.1,29) 14(-58.1,9.3) 15(-58.1,-10.3) 16(-58.1,-30)
  rect 66.9x66.9 smd: 20(0,-0.5)
  silkscreen extent -59,-94 59,59
TPS_QFN10 [mil] "TPS_QFN10"
  oval 31.5x11 smd: 1(-58.7,39.4) 2(-58.7,19.7) 3(-58.7,0) 4(-58.7,-19.7) 5(-58.7,-39.4) 6(59.5,-39.4) 7(59.5,-19.7) 8(59.5,0) 9(59.5,19.7) 10(59.5,39.4)
  oct 33.3x33.3 smd rot 3: 11(0.4,0)
  silkscreen extent -90,-91 91,91
TYPE-C-SMD_TYPE-C-6P [mm]
  oval 1.4x2.2 hole 0.8 slot 1.6 at 90 deg: 7(-4.32,-1.9) 7(-4.32,1.9) 7(4.32,-1.9) 7(4.32,1.9)
  rect 0.7x1.2 smd: A5(-0.5,1.9) B5(0.5,1.9)
  rect 0.8x1.2 smd: A9(1.52,1.9) B9(-1.52,1.9)
  rect 0.9x1.2 smd: A12(2.75,1.9) B12(-2.75,1.9)
  silkscreen extent -4.5,-4.5 4.5,2.55
ZYNQ7010&7020 [mm]
  rect 0.35x1.7 smd: J1_1(0,0) J1_2(0,-4.7) J1_3(0.8,0) J1_4(0.8,-4.7) J1_5(1.6,0) J1_6(1.6,-4.7) J1_7(2.4,0) J1_8(2.4,-4.7) J1_9(3.2,0) J1_10(3.2,-4.7) J1_11(4,0) J1_12(4,-4.7) J1_13(4.8,0) J1_14(4.8,-4.7) J1_15(5.6,0) J1_16(5.6,-4.7) J1_17(6.4,0) J1_18(6.4,-4.7) J1_19(7.2,0) J1_20(7.2,-4.7) J1_21(8.001,0) J1_22(8.001,-4.7) J1_23(8.801,0) J1_24(8.801,-4.7) J1_25(9.601,0) J1_26(9.601,-4.7) J1_27(10.401,0) J1_28(10.401,-4.7) J1_29(11.201,0) J1_30(11.201,-4.7) J1_31(12.001,0) J1_32(12.001,-4.7) J1_33(12.801,0) J1_34(12.801,-4.7) J1_35(13.601,0) J1_36(13.601,-4.7) J1_37(14.401,0) J1_38(14.401,-4.7) J1_39(15.201,0) J1_40(15.201,-4.7) J1_41(16.001,0) J1_42(16.001,-4.7) J1_43(16.801,0) J1_44(16.801,-4.7) J1_45(17.601,0) J1_46(17.601,-4.7) J1_47(18.401,0) J1_48(18.401,-4.7) J1_49(19.201,0) J1_50(19.201,-4.7) J1_51(20.001,0) J1_52(20.001,-4.7) J1_53(20.801,0) J1_54(20.801,-4.7) J1_55(21.601,0) J1_56(21.601,-4.7) J1_57(22.401,0) J1_58(22.401,-4.7) J1_59(23.201,0) J1_60(23.201,-4.7) J1_61(24.001,0) J1_62(24.001,-4.7) J1_63(24.801,0) J1_64(24.801,-4.7) J1_65(25.601,0) J1_66(25.601,-4.7) J1_67(26.401,0) J1_68(26.401,-4.7) J1_69(27.201,0) J1_70(27.201,-4.7) J1_71(28.001,0) J1_72(28.001,-4.7) J1_73(28.801,0) J1_74(28.801,-4.7) J1_75(29.601,0) J1_76(29.601,-4.7) J1_77(30.401,0) J1_78(30.401,-4.7) J1_79(31.201,0) J1_80(31.201,-4.7) J2_1(31.201,32.893) J2_2(31.201,37.593) J2_3(30.401,32.893) J2_4(30.401,37.593) J2_5(29.601,32.893) J2_6(29.601,37.593) J2_7(28.801,32.893) J2_8(28.801,37.593) J2_9(28.001,32.893) J2_10(28.001,37.593) J2_11(27.201,32.893) J2_12(27.201,37.593) J2_13(26.401,32.893) J2_14(26.401,37.593) J2_15(25.601,32.893) J2_16(25.601,37.593) J2_17(24.801,32.893) J2_18(24.801,37.593) J2_19(24.001,32.893) J2_20(24.001,37.593) J2_21(23.201,32.893) J2_22(23.201,37.593) J2_23(22.401,32.893) J2_24(22.401,37.593) J2_25(21.601,32.893) J2_26(21.601,37.593) J2_27(20.801,32.893) J2_28(20.801,37.593) J2_29(20.001,32.893) J2_30(20.001,37.593) J2_31(19.201,32.893) J2_32(19.201,37.593) J2_33(18.401,32.893) J2_34(18.401,37.593) J2_35(17.601,32.893) J2_36(17.601,37.593) J2_37(16.801,32.893) J2_38(16.801,37.593) J2_39(16.001,32.893) J2_40(16.001,37.593) J2_41(15.201,32.893) J2_42(15.201,37.593) J2_43(14.401,32.893) J2_44(14.401,37.593) J2_45(13.601,32.893) J2_46(13.601,37.593) J2_47(12.801,32.893) J2_48(12.801,37.593) J2_49(12.001,32.893) J2_50(12.001,37.593) J2_51(11.201,32.893) J2_52(11.201,37.593) J2_53(10.401,32.893) J2_54(10.401,37.593) J2_55(9.601,32.893) J2_56(9.601,37.593) J2_57(8.801,32.893) J2_58(8.801,37.593) J2_59(8.001,32.893) J2_60(8.001,37.593) J2_61(7.2,32.893) J2_62(7.2,37.593) J2_63(6.4,32.893) J2_64(6.4,37.593) J2_65(5.6,32.893) J2_66(5.6,37.593) J2_67(4.8,32.893) J2_68(4.8,37.593) J2_69(4,32.893) J2_70(4,37.593) J2_71(3.2,32.893) J2_72(3.2,37.593) J2_73(2.4,32.893) J2_74(2.4,37.593) J2_75(1.6,32.893) J2_76(1.6,37.593) J2_77(0.8,32.893) J2_78(0.8,37.593) J2_79(0,32.893) J2_80(0,37.593)
  round 1.3 hole 1.3 unplated: ""(-2.511,-2.35) ""(-2.511,35.243)
  round 0.9 hole 0.9 unplated: ""(33.74,-2.35) ""(33.74,35.243)
  silkscreen extent -5.59,-6.1 36.32,38.95

## Part data
C1 C2 C3 C4 C5 C6 C7 C24 C25 C26 C27 C129 C132 C134 C137: library part Cap, "Capacitor", LatestRevisionDate=17-Jul-2002, LatestRevisionNote="Re-released for DXP Platform.", PackageDescription="Radial Cap, Thru-Hole; 2 Leads; 0.3 in Pin Spacing", PackageReference=RAD-0.3, Published=8-Jun-2000, Publisher="Altium Limited"
C8 C9 C10 C12 C13 C14 C15 C16 C17 C18 C21 C22 C23 C30 C31 C33 C35 C37 C39 C42 C44 C45 C46 C47 C48 C113 C114 C115 C117 C119 C120 C122 C124 C126 C148 C213: library part CAPACITOR, "Generic Capacitor"
C127 C128 C130 C131 C133 C135 C136 C138: library part C
DONE S0: library part LED0, "Typical INFRARED GaAs LED", LatestRevisionDate=08-Jul-2005, LatestRevisionNote="Mech Layer 1 removed.", PackageDescription="LED; 2 Leads", PackageReference=LED-0, Published=8-Jun-2000, Publisher="Altium Limited"
G1 G2: library part FXO-HC5, "3.3V HCMOS Oscillator", Manufacturer="Fox Electronics"
L1 L2 L3 L4: BOM_Manufacturer=Sunlord, BOM_Manufacturer Part=MPL2520S100MWT, BOM_Supplier=LCSC, BOM_Supplier Part=C370039, Contributor=LCSC, nameAlias=Inductance, spicePre=L, spiceSymbolName=MPL2520S100MWT
M1: library part ZYNQ7010&7020, "ZYNQ7010&7020 Core Board"
P1: "Header, 3-Pin", LatestRevisionDate=17-Jul-2002, LatestRevisionNote="Re-released for DXP Platform.", Publisher="Altium Limited"
R1 R2 R3 R4 R5 R6 R7 R8 R9 R10 R11 R12 R17 R18 R19: library part Res1, "Resistor", LatestRevisionDate=17-Jul-2002, LatestRevisionNote="Re-released for DXP Platform.", PackageDescription="Axial Device, Thru-Hole; 2 Leads; 0.3 in Pin Spacing", PackageReference=AXIAL-0.3, Published=8-Jun-2000, Publisher="Altium Limited"
R13 R15 R16 R22 R28 R31 R32 R33 R34 R35 R36 R37 R38 R40 R42 R52 R53 R54 R55 R57 R58 R59 R60 R61 R62 R67 R69 R70 R98 R105: library part RESISTOR, "Generic Resistor"
RESET1 RESET2: "Switch", LatestRevisionDate=17-Jul-2002, LatestRevisionNote="Re-released for DXP Platform.", PackageDescription="Switch; 2 Leads", PackageReference=SPST-2, Published=24-Mar-1999, Publisher="Altium Limited"
RR1 RR2 RR3 RR4 RR5 RR6: library part "Res -4", "Isolated Resistor Network", Code_IPC=SOIC127P600-16, Code_JEDEC=MS-012-AC, LatestRevisionDate=29-May-2009, LatestRevisionNote="IPC-7351 Footprint Added.", PackageDescription="16-Pin Small Outline Integrated Circuit 1.27 mm Pitch", PackageReference=SO-16, Published=24-Mar-1999, Publisher="Altium Limited"
U1: library part XC7Z020-CLG400, "Zynq 7000 FPGA 20 Die, in a CSG 484 Package", Manufacturer=Xilinx
U5: library part N25Q12-F8, "Serial Flash Memory, 16Mbit, Low Voltage, 50MHz SPI Bus Interface", Manufacturer=Spansion
U6: library part MT41JxxxMxx, "DDR3 SDRAM 2Gb x4, x8, x16", Manufacturer=Micron
USB1: BOM_Manufacturer="SHOU HAN", BOM_Manufacturer Part="TYPE-C 6P", BOM_Supplier=LCSC, BOM_Supplier Part=C456012, Contributor=LCSC, spicePre=U, spiceSymbolName="TYPE-C 6P"
X1: library part "Header 6", "Header, 6-Pin", LatestRevisionDate=17-Jul-2002, LatestRevisionNote="Re-released for DXP Platform.", Publisher="Altium Limited"

## Via types
v1: diameter 18, hole 8, Top Layer to Bottom Layer, tented both sides, 708 vias
v2: diameter 40, hole 20, Top Layer to Bottom Layer, tented both sides, 2 vias

## Nets (pads, with @x,y where several pads share a name; then routed paths per layer and width w, separated by ;. In a path a pad name is that pad's centre, name@x,y a point inside that pad or via, vN(x,y) a via of type N, cw(c..) or ccw(c..) an arc to the next point about the centre after c; other vN are vias at no path point)
ADDR3-A0: RR4.5 U1.N2 U6.N3 | length 1816.2
  Top Layer w3.5: v1(542,1636) 542,1672 526.75,1687.25 526.75,1826.25 435,1918 435,2061.8 494.2,2121 607,2121 ; 596.5,2121 607,2121 ; 609.47,2118.53 607,2121 ; 619.38,2108.63 665.03,2062.97 708.13,2019.87 827.14,2019.87 ; 657.57,2070.43 607,2121 ; 809.64,2019.87 827.14,2019.87 ; v1(838.52,2062.74) U6.N3@854.27,2046.99 827.14,2019.87 ; v1(876,1587) 876,1497.3 U1.N2@891.95,1481.35
  Bottom Layer w3.5: v1(542,1636) 586,1636 606,1616 852,1616 876,1592 v1(876,1587) ; RR4.5@779.4,2291 779.4,2243.6 ; 780,2242 779.4,2242.6 779.4,2243.6 ; v1(838.52,2062.74) 836.26,2062.74 822,2077 822,2101 841.25,2120.25 841.25,2181.75 779.4,2243.6
ADDR3-A1: RR2.7 U1.K2 U6.P7 | length 1923.6
  Top Layer w3.5: v1(650,1678) 638,1690 638,1695.25 638,1700.5 cw(c643.25,1700.5) 643.25,1705.75 727.59,1705.75 ccw(c727.59,1711) 732.84,1711 ccw(c727.59,1711) 727.59,1716.25 638,1716.25 610.28,1716.25 cw(c610.28,1721.5) 605.03,1721.5 cw(c610.28,1721.5) 610.28,1726.75 632.75,1726.75 ccw(c632.75,1732) 638,1732 638,1840 551,1927 551,1977 557.5,1983.5 597.5,1983.5 616,1965 778.78,1965 v1(807.02,1936.76) U6.P7@822.77,1921.01 ; v1(956.45,1601.96) 956.45,1596.55 970,1583 970,1497.8 U1.K2@986.45,1481.35
  Bottom Layer w3.5: RR2.7@536,2285 535.64,2284.64 535.64,2073.81 644.95,1964.5 767.94,1964.5 792.9,1939.53 804.25,1939.53 v1(807.02,1936.76) ; v1(650,1678) 650,1675 648,1673 746,1673 768,1695 874.9,1695 956.45,1613.45 v1(956.45,1601.96)
ADDR3-A2: RR4.7 U1.M3 U6.P3 | length 2020.1
  Top Layer w3.5: 426.42,2076.25 cw(c426.42,2071) 431.67,2071 cw(c426.42,2071) 426.42,2065.75 424.5,2065.75 ccw(c424.5,2062.25) 421,2062.25 421,2058.75 ccw(c424.5,2058.75) 424.5,2055.25 cw(c424.5,2051.75) 428,2051.75 428,2048.25 cw(c424.5,2048.25) 424.5,2044.75 ccw(c424.5,2041.25) 421,2041.25 421,2037.75 ccw(c424.5,2037.75) 424.5,2034.25 cw(c424.5,2030.75) 428,2030.75 428,2027.25 cw(c424.5,2027.25) 424.5,2023.75 ccw(c424.5,2020.25) 421,2020.25 421,2016.75 ccw(c424.5,2016.75) 424.5,2013.25 cw(c424.5,2009.75) 428,2009.75 428,2006.25 cw(c424.5,2006.25) 424.5,2002.75 ccw(c424.5,1999.25) 421,1999.25 421,1995.75 ccw(c424.5,1995.75) 424.5,1992.25 cw(c424.5,1988.75) 428,1988.75 428,1985.25 cw(c424.5,1985.25) 424.5,1981.75 ccw(c424.5,1978.25) 421,1978.25 421,1974.75 ccw(c424.5,1974.75) 424.5,1971.25 cw(c424.5,1967.75) 428,1967.75 428,1964.25 cw(c424.5,1964.25) 424.5,1960.75 ccw(c424.5,1957.25) 421,1957.25 421,1953.75 ccw(c424.5,1953.75) 424.5,1950.25 cw(c424.5,1946.75) 428,1946.75 428,1943.25 cw(c424.5,1943.25) 424.5,1939.75 ccw(c424.5,1936.25) 421,1936.25 421,1932.75 ccw(c424.5,1932.75) 424.5,1929.25 424.5,1918.75 424.5,1913.5 430.87,1907.13 ccw(c433.34,1904.66) 430.87,1902.18 433.34,1899.71 ccw(c435.82,1902.19) 438.29,1899.71 cw(c440.84,1897.16) 443.39,1899.71 445.72,1897.39 cw(c443.17,1894.84) 445.72,1892.29 ccw(c448.19,1889.81) 445.72,1887.33 448.19,1884.86 ccw(c450.66,1887.34) 453.14,1884.86 cw(c455.69,1882.31) 458.24,1884.86 460.57,1882.54 cw(c458.01,1879.99) 460.57,1877.44 ccw(c463.04,1874.96) 460.57,1872.48 463.04,1870.01 ccw(c465.51,1872.49) 467.99,1870.01 cw(c470.54,1867.46) 473.09,1870.01 475.41,1867.69 cw(c472.86,1865.14) 475.41,1862.59 ccw(c477.89,1860.11) 475.41,1857.64 477.89,1855.16 ccw(c480.36,1857.64) 482.84,1855.16 cw(c485.39,1852.61) 487.94,1855.16 490.26,1852.84 cw(c487.71,1850.29) 490.26,1847.74 ccw(c492.74,1845.26) 490.26,1842.79 492.74,1840.31 ccw(c495.21,1842.79) 497.69,1840.31 cw(c500.24,1837.76) 502.79,1840.31 505.11,1837.99 cw(c502.56,1835.44) 505.11,1832.89 512.54,1825.46 516.25,1821.75 516.25,1817.25 516.25,1812 516.25,1672.25 v1(515,1671) ; 426.88,2076.25 cw(c426.88,2078.63) 424.5,2078.63 424.5,2083.71 428.21,2087.42 431.92,2091.13 cw(c435.64,2087.42) 439.35,2091.13 442.86,2087.62 ccw(c446.57,2091.34) 450.28,2087.62 ccw(c446.57,2091.34) 450.28,2095.05 443.06,2102.27 cw(c445.54,2104.74) 443.06,2107.22 445.53,2109.69 cw(c448.01,2107.22) 450.49,2109.69 457.71,2102.47 ccw(c461.42,2106.19) 465.13,2102.47 ccw(c461.42,2106.19) 465.13,2109.9 457.91,2117.12 cw(c460.39,2119.59) 457.91,2122.07 460.38,2124.54 cw(c462.86,2122.07) 465.34,2124.54 472.76,2131.97 474.79,2134 480.04,2134 489.79,2134 cw(c489.79,2133.25) 490.54,2133.25 ccw(c495.79,2133.25) 495.79,2128 ccw(c495.79,2133.25) 501.04,2133.25 501.04,2134 cw(c506.05,2134) 506.05,2139 506.54,2139 cw(c506.54,2134) 511.54,2134 511.54,2133.7 ccw(c516.79,2133.7) 516.79,2128.45 ccw(c516.79,2133.7) 522.04,2133.7 522.04,2134 cw(c527.05,2134) 527.05,2139 527.54,2139 cw(c527.54,2134) 532.54,2134 532.54,2133.7 ccw(c537.79,2133.7) 537.79,2128.45 ccw(c537.79,2133.7) 543.04,2133.7 543.04,2134 cw(c548.05,2134) 548.05,2139 548.54,2139 cw(c548.54,2134) 553.54,2134 553.54,2133.7 ccw(c558.79,2133.7) 558.79,2128.45 ccw(c558.79,2133.7) 564.04,2133.7 564.04,2134 cw(c569.05,2134) 569.05,2139 569.54,2139 cw(c569.54,2134) 574.54,2134 574.54,2133.7 ccw(c579.79,2133.7) 579.79,2128.45 ccw(c579.79,2133.7) 585.04,2133.7 585.04,2134 cw(c590.05,2134) 590.05,2139 590.54,2139 cw(c590.54,2134) 595.54,2134 619,2134 622.71,2130.29 626.42,2126.58 ccw(c630.14,2130.29) 633.85,2126.58 cw(c637.56,2122.86) 641.27,2126.58 cw(c637.56,2122.86) 641.27,2119.15 ccw(c644.99,2115.44) 641.27,2111.73 713.5,2039.5 726.13,2026.87 802.65,2026.87 U6.P3@822.77,2046.99 808,2061.76 808,2062 v1(807,2063) ; v1(907.7,1465.6) U1.M3@923.45,1449.85
  Bottom Layer w3.5: v1(515,1671) 528,1658 587,1658 599,1646 870.7,1646 907.7,1609 v1(907.7,1465.6) ; RR4.7@739.24,2291 739.24,2157.76 792,2105 792,2078 v1(807,2063)
ADDR3-A3: RR5.8 U1.K3 U6.N2 | length 2022.8
  Top Layer w3.5: v1@453.95,1769.05 370,1853 370,2103.45 468.55,2202 762,2202 772.83,2191.17 812,2152 829.52,2152 838.52,2143 v1(838.52,2094.24) U6.N2@854.27,2078.49 ; U1.K3@986.45,1449.85 v1(1002.2,1465.6)
  Bottom Layer w3.5: v1@454,1770.25 538.75,1770.25 567,1742 698,1742 715.25,1759.25 891.75,1759.25 977.5,1673.5 993.5,1673.5 1013,1654 1013,1597 1002.2,1586.2 v1(1002.2,1465.6) ; RR5.8@820.57,2291 820.57,2215.43 848.25,2187.75 848.25,2110.25 838.52,2100.52 v1(838.52,2094.24)
  other v1: 454,1769
ADDR3-A4: RR1.6 U1.M4 U6.P8 | length 1759
  Top Layer w3.5: v1(807.28,1905.27) U6.P8@823.03,1889.52 ; v1(815,1665) 807.02,1672.98 807.02,1678.75 807.02,1684 cw(c812.27,1684) 812.27,1689.25 836.75,1689.25 ccw(c836.75,1694.5) 842,1694.5 ccw(c836.75,1694.5) 836.75,1699.75 812.27,1699.75 cw(c812.27,1705) 807.02,1705 cw(c812.27,1705) 812.27,1710.25 836.75,1710.25 ccw(c836.75,1715.5) 842,1715.5 ccw(c836.75,1715.5) 836.75,1720.75 812.27,1720.75 cw(c812.27,1726) 807.02,1726 cw(c812.27,1726) 812.27,1731.25 836.75,1731.25 ccw(c836.75,1736.5) 842,1736.5 ccw(c836.75,1736.5) 836.75,1741.75 812.27,1741.75 cw(c812.27,1747) 807.02,1747 cw(c812.27,1747) 812.27,1752.25 836.75,1752.25 ccw(c836.75,1757.5) 842,1757.5 ccw(c836.75,1757.5) 836.75,1762.75 812.27,1762.75 cw(c812.27,1768) 807.02,1768 cw(c812.27,1768) 812.27,1773.25 836.75,1773.25 ccw(c836.75,1778.5) 842,1778.5 ccw(c836.75,1778.5) 836.75,1783.75 812.27,1783.75 cw(c812.27,1789) 807.02,1789 cw(c812.27,1789) 812.27,1794.25 836.75,1794.25 ccw(c836.75,1799.5) 842,1799.5 ccw(c836.75,1799.5) 836.75,1804.75 807.02,1804.75 787.75,1804.75 cw(c787.75,1810) 782.5,1810 cw(c787.75,1810) 787.75,1815.25 807.02,1815.25 810.61,1815.25 ccw(c810.61,1820.5) 815.86,1820.5 ccw(c810.61,1820.5) 810.61,1825.75 cw(c810.61,1829.34) 807.02,1829.34 807.02,1836.25 807.02,1846.75 807.02,1852 807.02,1873.76 U6.P8@822.77,1889.51 ; v1(907.7,1434.1) U1.M4@923.45,1418.35
  Bottom Layer w3.5: RR1.6@454,2291 453.53,2290.53 453.53,2111.38 643.9,1921 791.55,1921 v1(807.28,1905.27) ; v1(815,1665) 826,1654 831.25,1654 841.75,1654 847,1654 ccw(c847,1659.25) 852.25,1659.25 852.25,1667 cw(c857.5,1667) 857.5,1672.25 cw(c857.5,1667) 862.75,1667 862.75,1659.25 ccw(c868,1659.25) 868,1654 873.25,1654 880,1654 883.71,1650.29 885.5,1648.5 914.7,1619.3 914.7,1574.3 924.75,1564.25 933.75,1564.25 943,1555 943,1545.1 921.95,1524.05 921.95,1518.8 921.95,1510.3 cw(c919.95,1510.3) 919.95,1508.3 ccw(c919.95,1503.05) 914.7,1503.05 ccw(c919.95,1503.05) 919.95,1497.8 921.95,1497.8 943.75,1497.8 cw(c943.75,1492.55) 949,1492.55 cw(c943.75,1492.55) 943.75,1487.3 921.95,1487.3 919.95,1487.3 ccw(c919.95,1482.05) 914.7,1482.05 ccw(c919.95,1482.05) 919.95,1476.8 921.95,1476.8 cw(c921.95,1473.34) 925.41,1473.34 925.41,1469.76 cw(c921.95,1469.76) 921.95,1466.3 921.95,1458 921.95,1445.95 910.1,1434.1 v1(907.7,1434.1)
ADDR3-A5: RR4.6 U1.L1 U6.P2 | length 1835.7
  Top Layer w3.5: v1(476,1699) 473.75,1701.25 473.75,1780.25 382,1872 382,2100.6 469.9,2188.5 756.52,2188.5 807.02,2138 v1(807.02,2094.24) U6.P2@822.77,2078.49 ; v1(942,1586) 954.85,1573.15 U1.L1@954.85,1512.85
  Bottom Layer w3.5: v1@476,1701 505.26,1701 541.26,1665 589.9,1665 591.9,1663 750,1663 773.25,1686.25 873.75,1686.25 942,1618 v1(942,1586) ; RR4.6@758.93,2291 758.93,2200.07 807,2152 v1(807.02,2094.24)
ADDR3-A6: RR1.7 U1.L4 U6.R8 | length 1817.1
  Top Layer w3.5: v1(775.79,1905.27) U6.R8@791.54,1889.52 ; v1(788,1668) 775.53,1680.47 775.53,1685 ccw(c770.28,1685) 770.28,1690.25 735.71,1690.25 cw(c735.71,1695.5) 730.46,1695.5 cw(c735.71,1695.5) 735.71,1700.75 775.53,1700.75 794.77,1700.75 ccw(c794.77,1706) 800.02,1706 ccw(c794.77,1706) 794.77,1711.25 775.53,1711.25 764.07,1711.25 cw(c764.07,1716.5) 758.82,1716.5 cw(c764.07,1716.5) 764.07,1721.75 775.53,1721.75 794.77,1721.75 ccw(c794.77,1727) 800.02,1727 ccw(c794.77,1727) 794.77,1732.25 775.53,1732.25 768,1732.25 cw(c768,1737.5) 762.75,1737.5 cw(c768,1737.5) 768,1742.75 775.53,1742.75 794.77,1742.75 ccw(c794.77,1748) 800.02,1748 ccw(c794.77,1748) 794.77,1753.25 775.53,1753.25 744.25,1753.25 cw(c744.25,1758.5) 739,1758.5 cw(c744.25,1758.5) 744.25,1763.75 775.53,1763.75 794.77,1763.75 ccw(c794.77,1769) 800.02,1769 ccw(c794.77,1769) 794.77,1774.25 775.53,1774.25 744.25,1774.25 cw(c744.25,1779.5) 739,1779.5 cw(c744.25,1779.5) 744.25,1784.75 775.53,1784.75 794.77,1784.75 ccw(c794.77,1790) 800.02,1790 ccw(c794.77,1790) 794.77,1795.25 775.53,1795.25 744.25,1795.25 cw(c744.25,1800.5) 739,1800.5 cw(c744.25,1800.5) 744.25,1805.75 770.28,1805.75 ccw(c770.28,1811) 775.53,1811 775.53,1858 775.53,1873.76 U6.R8@791.28,1889.51 ; v1(939.1,1434.1) U1.L4@954.85,1418.35
  Bottom Layer w3.5: RR1.7@433.84,2291 432,2289.16 432,2118.06 644.79,1905.27 v1(775.79,1905.27) ; v1(788,1668) 789,1668 800.25,1679.25 868.75,1679.25 921,1627 921,1622.9 921.7,1622.2 921.7,1586.15 936.6,1571.25 938.01,1571.25 956,1553.26 956,1451 v1(939.1,1434.1)
ADDR3-A7: RR4.8 U1.K4 U6.R2 | length 1868.7
  Top Layer w3.5: v1(501,1723) 487.25,1736.75 487.25,1793.75 392.5,1888.5 392.5,2096.25 471.25,2175 471.5,2175 680.03,2175 732.53,2175 775.53,2132 775.53,2130.62 775.53,2123.62 v1(775.53,2094.24) U6.R2@791.28,2078.49 ; v1(970.7,1434.1) U1.K4@986.45,1418.35
  Bottom Layer w3.5: v1(501,1723) 529,1695 758.1,1695 765.1,1702 882.74,1702 970.7,1614.04 970.7,1527.77 970,1527.07 970,1434.8 v1(970.7,1434.1) ; RR4.8@718.77,2291 718.77,2128.23 739.75,2107.25 762.51,2107.25 v1(775.53,2094.24)
ADDR3-A8: RR1.8 U1.K1 U6.T8 | length 2223
  Top Layer w3.5: v1@737,1893 734.02,1893 723.02,1904 722.25,1904 717,1904 cw(c717,1909.25) 711.75,1909.25 711.75,1924.51 ccw(c706.5,1924.51) 706.5,1929.76 ccw(c706.5,1924.51) 701.25,1924.51 701.25,1909.25 cw(c696,1909.25) 696,1904 691,1904 689,1904 cw(c689,1909.25) 683.75,1909.25 683.75,1924.51 ccw(c678.5,1924.51) 678.5,1929.76 ccw(c678.5,1924.51) 673.25,1924.51 673.25,1909.25 cw(c668,1909.25) 668,1904 666.05,1904 664,1901.95 664,1893 667,1890 684.5,1872.5 688.21,1868.79 691.92,1865.08 cw(c688.21,1861.36) 691.92,1857.65 675.54,1841.26 ccw(c679.25,1837.55) 675.54,1833.84 ccw(c679.25,1837.55) 682.96,1833.84 703.06,1853.94 727.6,1878.47 cw(c731.31,1874.76) 735.02,1878.47 cw(c731.31,1874.76) 735.02,1871.05 710.49,1846.51 676.15,1812.17 ccw(c679.86,1808.46) 676.15,1804.75 ccw(c679.86,1808.46) 683.57,1804.75 717.91,1839.09 737.89,1859.07 cw(c741.6,1855.35) 745.31,1859.07 cw(c741.6,1855.35) 745.31,1851.64 729.05,1835.38 ccw(c732.76,1831.66) 729.05,1827.95 732,1825 732,1819.75 732,1809.25 732,1804 cw(c726.75,1804) 726.75,1798.75 702.38,1798.75 ccw(c702.38,1793.5) 697.13,1793.5 ccw(c702.38,1793.5) 702.38,1788.25 726.75,1788.25 cw(c726.75,1783) 732,1783 cw(c726.75,1783) 726.75,1777.75 697.04,1777.75 ccw(c697.04,1772.5) 691.79,1772.5 ccw(c697.04,1772.5) 697.04,1767.25 726.75,1767.25 cw(c726.75,1762) 732,1762 732,1756.75 732,1755 732,1748 v1(750,1730) ; v1(737.51,1889.51) U6.T8@759.78,1889.51 ; U1.K1@986.45,1512.85 986.45,1520 986.45,1523.25 986.45,1529.55 ccw(c982.25,1529.55) 982.25,1533.75 cw(c982.25,1539) 977,1539 cw(c982.25,1539) 982.25,1544.25 986.45,1544.25 995.75,1544.25 ccw(c995.75,1549.5) 1001,1549.5 ccw(c995.75,1549.5) 995.75,1554.75 986.45,1554.75 982.25,1554.75 cw(c982.25,1560) 977,1560 cw(c982.25,1560) 982.25,1565.25 986.45,1565.25 995.75,1565.25 ccw(c995.75,1570.5) 1001,1570.5 ccw(c995.75,1570.5) 995.75,1575.75 986.45,1575.75 982.25,1575.75 cw(c982.25,1581) 977,1581 cw(c982.25,1581) 982.25,1586.25 986.45,1586.25 995.75,1586.25 ccw(c995.75,1591.5) 1001,1591.5 ccw(c995.75,1591.5) 995.75,1596.75 986.45,1596.75 975.95,1596.75 cw(c975.95,1602) 970.7,1602 cw(c975.95,1602) 975.95,1607.25 986.45,1607.25 995.75,1607.25 ccw(c995.75,1612.5) 1001,1612.5 ccw(c995.75,1612.5) 995.75,1617.75 991.7,1617.75 cw(c991.7,1623) 986.45,1623 986.45,1636.45 v1(988,1638)
  Bottom Layer w3.5: RR1.8@413,2292 413,2118 641.49,1889.51 v1(737.51,1889.51) ; v1(750,1730) 755,1725 770,1725 ccw(c770,1730.25) 775.25,1730.25 775.25,1733.25 cw(c780.5,1733.25) 780.5,1738.5 cw(c780.5,1733.25) 785.75,1733.25 785.75,1725 785.75,1721.25 ccw(c791,1721.25) 791,1716 ccw(c791,1721.25) 796.25,1721.25 796.25,1725 796.25,1733.25 cw(c801.5,1733.25) 801.5,1738.5 cw(c801.5,1733.25) 806.75,1733.25 806.75,1725 806.75,1721.25 ccw(c812,1721.25) 812,1716 ccw(c812,1721.25) 817.25,1721.25 817.25,1725 817.25,1733.25 cw(c822.5,1733.25) 822.5,1738.5 cw(c822.5,1733.25) 827.75,1733.25 827.75,1725 827.75,1721.25 ccw(c833,1721.25) 833,1716 ccw(c833,1721.25) 838.25,1721.25 838.25,1725 838.25,1733.25 cw(c843.5,1733.25) 843.5,1738.5 cw(c843.5,1733.25) 848.75,1733.25 848.75,1725 848.75,1721.25 ccw(c854,1721.25) 854,1716 ccw(c854,1721.25) 859.25,1721.25 859.25,1725 859.25,1733.25 cw(c864.5,1733.25) 864.5,1738.5 cw(c864.5,1733.25) 869.75,1733.25 869.75,1725 869.75,1721.25 ccw(c875,1721.25) 875,1716 ccw(c875,1721.25) 880.25,1721.25 cw(c884,1721.25) 884,1725 890.75,1725 892,1725 895.71,1721.29 902.43,1714.57 ccw(c903.14,1715.28) 903.85,1714.57 cw(c907.56,1710.86) 911.27,1714.57 cw(c907.56,1710.86) 911.27,1707.15 910.56,1706.44 ccw(c913.61,1703.39) 910.56,1700.34 911.88,1699.01 ccw(c914.93,1702.07) 917.99,1699.01 918.69,1699.72 cw(c922.41,1696.01) 926.12,1699.72 cw(c922.41,1696.01) 926.12,1692.3 925.41,1691.59 ccw(c928.46,1688.54) 925.41,1685.49 926.73,1684.16 ccw(c929.78,1687.22) 932.84,1684.16 933.54,1684.87 cw(c937.26,1681.16) 940.97,1684.87 cw(c937.26,1681.16) 940.97,1677.45 940.26,1676.74 ccw(c943.31,1673.69) 940.26,1670.64 941.58,1669.32 ccw(c944.63,1672.37) 947.68,1669.32 948.39,1670.02 cw(c952.11,1666.31) 955.82,1670.02 cw(c952.11,1666.31) 955.82,1662.6 955.11,1661.89 ccw(c958.16,1658.84) 955.11,1655.79 956.43,1654.47 ccw(c959.48,1657.52) 962.53,1654.47 964.66,1656.59 cw(c968.37,1652.88) 972.08,1656.59 cw(c968.37,1652.88) 972.08,1649.17 971,1648.08 ccw(c972.04,1647.04) 971,1646 979,1638 v1(988,1638)
ADDR3-A9: RR3.5 U1.J4 U6.R3 | length 1938.6
  Top Layer w3.5: v1(502,1796) 493.25,1804.75 493.25,1829.9 414,1909.15 414,2088.06 471.94,2146 632,2146 744,2034 744,2033.87 778.15,2033.87 U6.R3@791.28,2046.99 v1(775.53,2062.74) ; U1.J4@1017.85,1418.35 v1(1033.6,1434.1)
  Bottom Layer w3.5: v1(502,1796) 536,1796 578,1754 692,1754 706,1768 897,1768 983,1682 997.7,1682 1020.35,1659.35 1020.35,1581.15 1010,1570.8 1010,1478 1019.35,1468.65 1019.35,1448.35 v1(1033.6,1434.1) ; RR3.5@678.75,2283.75 678.75,2229.25 679,2229 679,2116 718.75,2076.25 762.02,2076.25 v1(775.53,2062.74)